# Altium PCB CanSat OBC.PcbDoc
Units mm, origin at the board's own origin, x right, y up, seen from the top; angles counter-clockwise.
Board outline 50 x 50 mm, 4 copper layers (Top Layer, Ground, Power, Bottom Layer), stack 1.641 mm thick; 37 components, 59 nets, 255 pads, 108 vias.
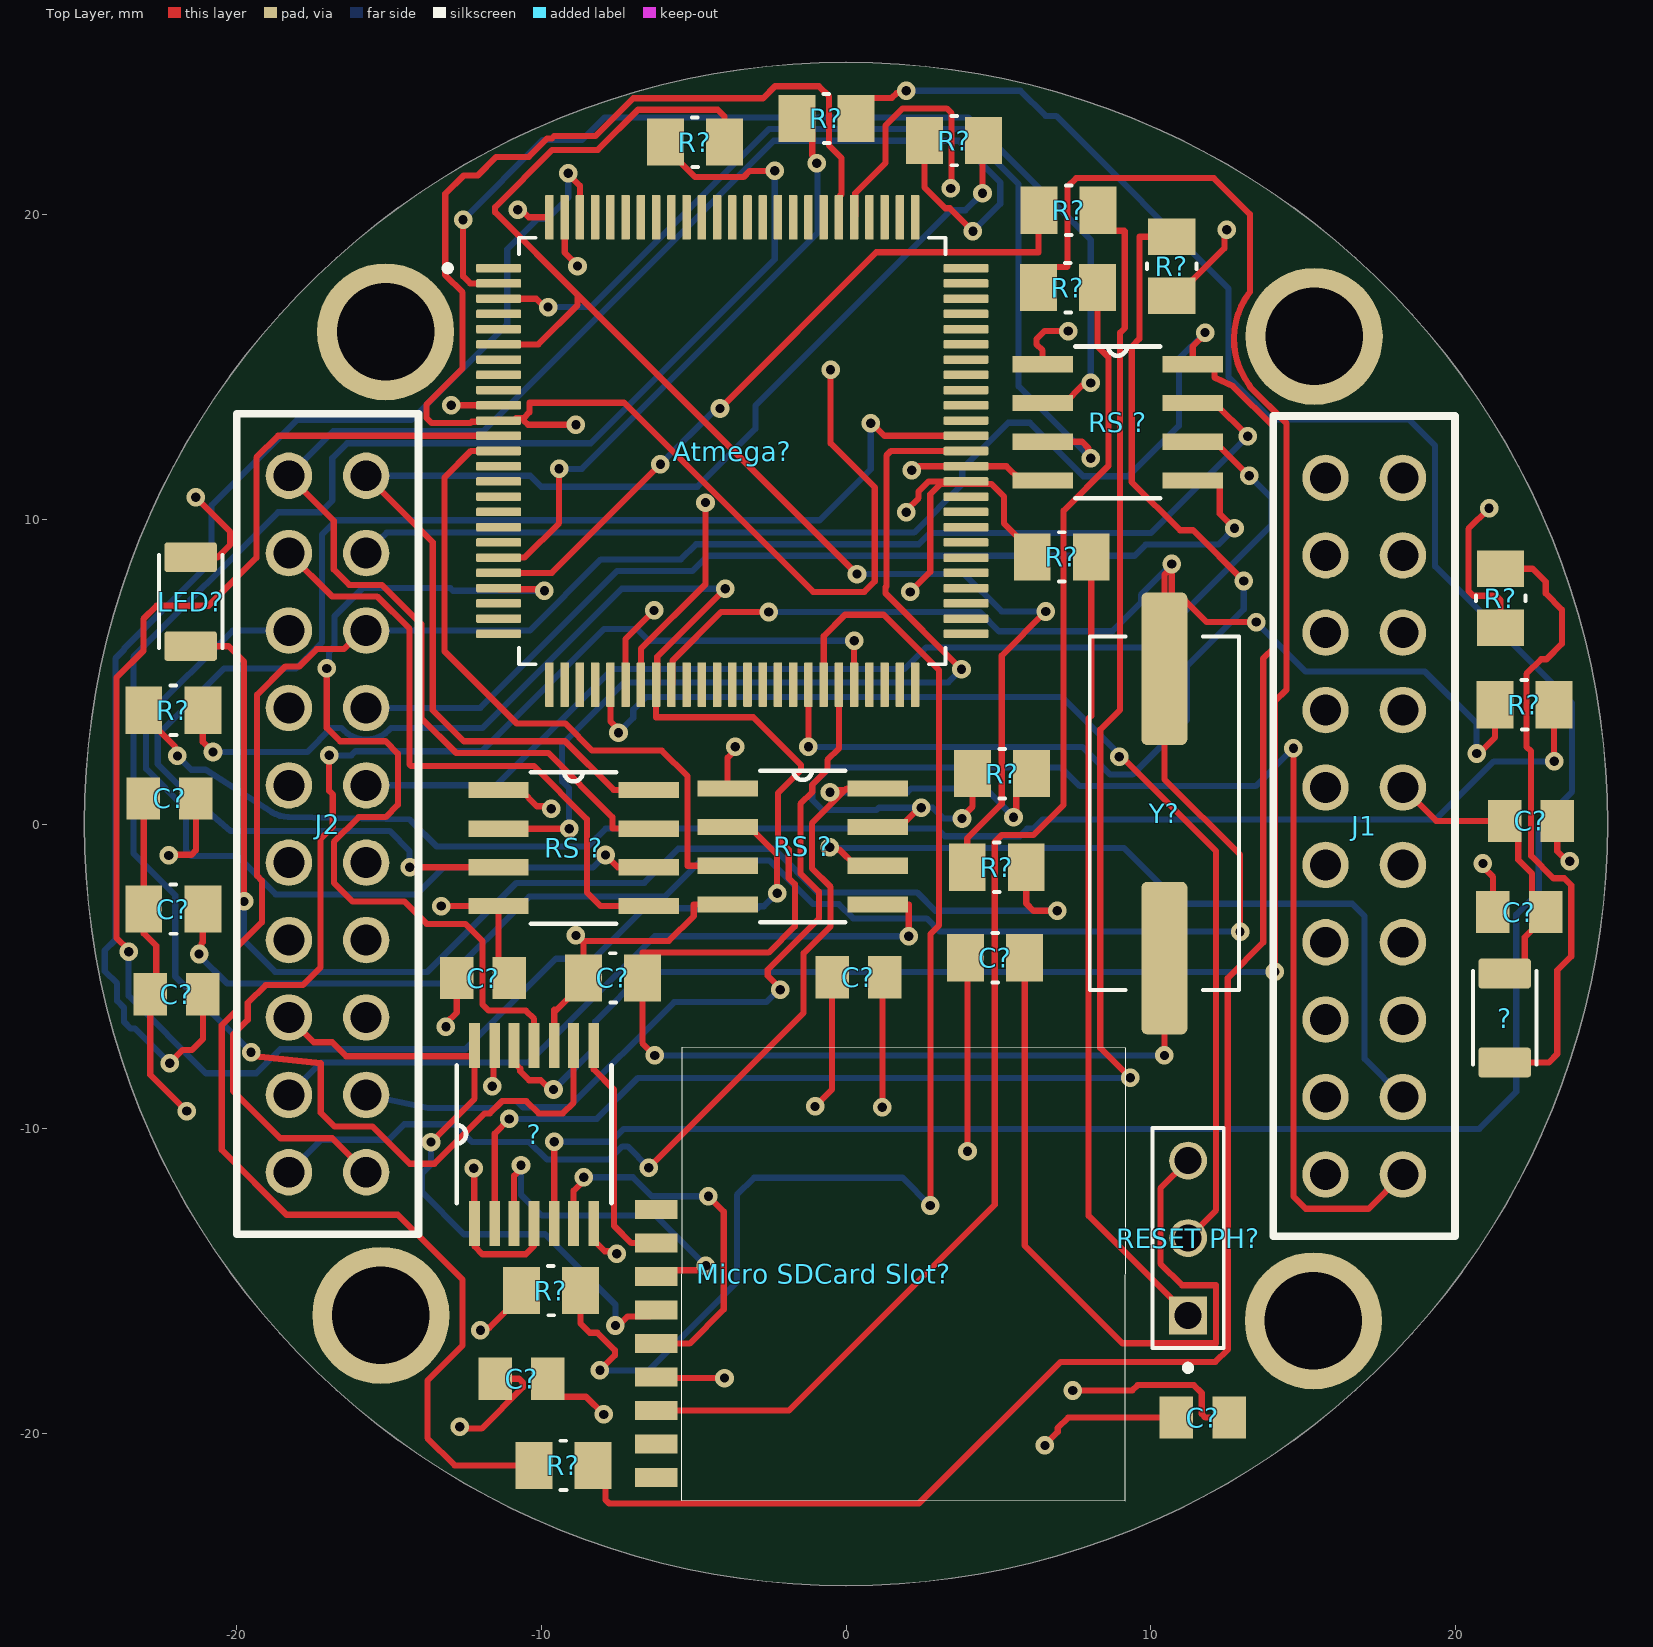
[diagram p0: Top Layer view]
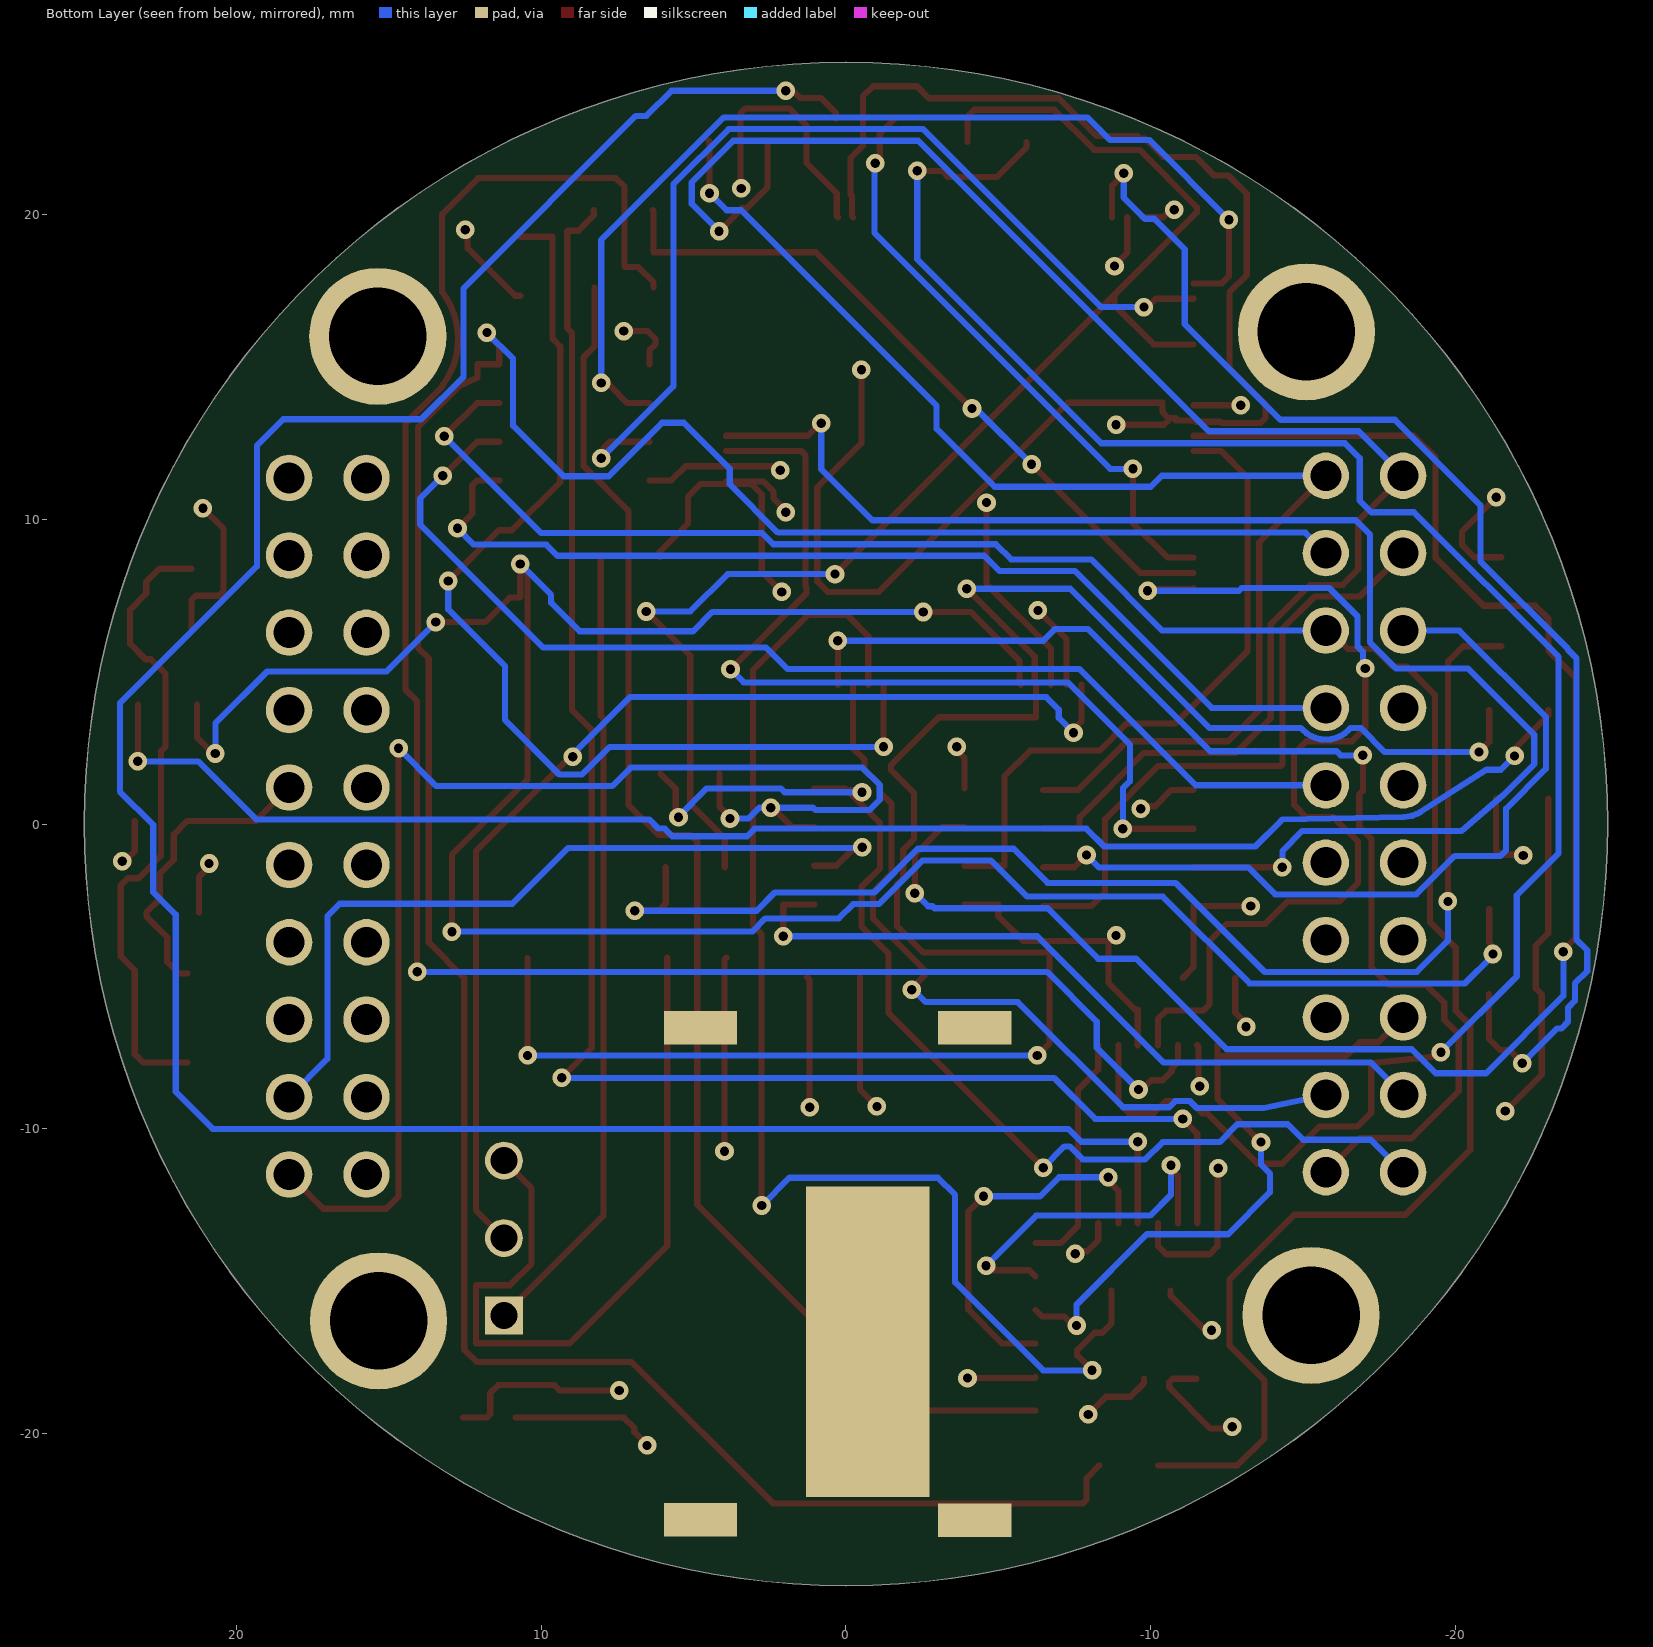
[diagram p1: Bottom Layer view, seen from below]
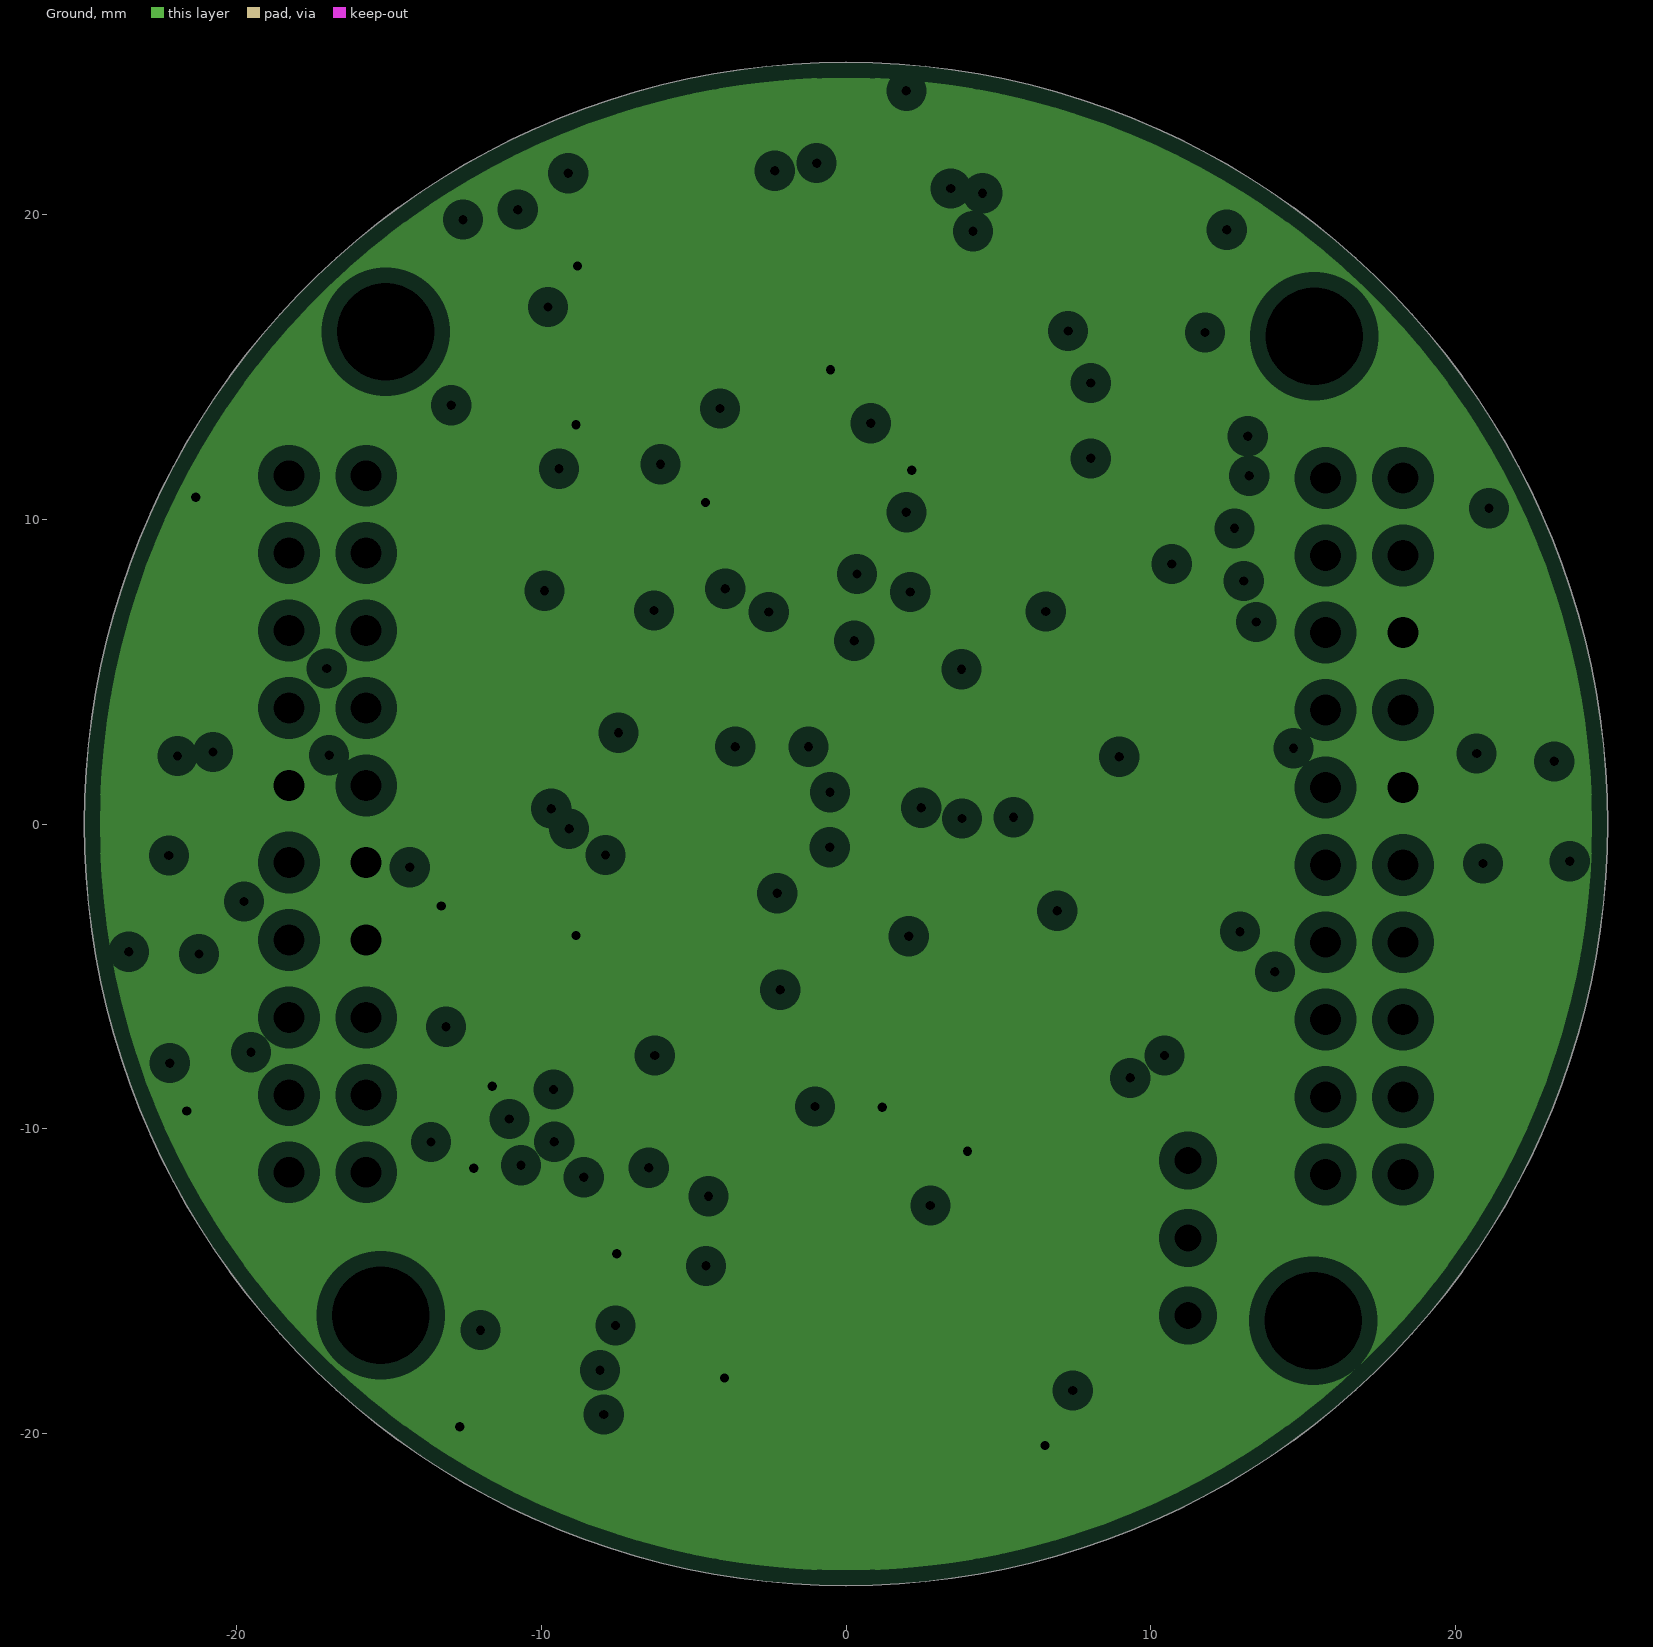
[diagram p2: Ground, clearances drawn from the general rule]
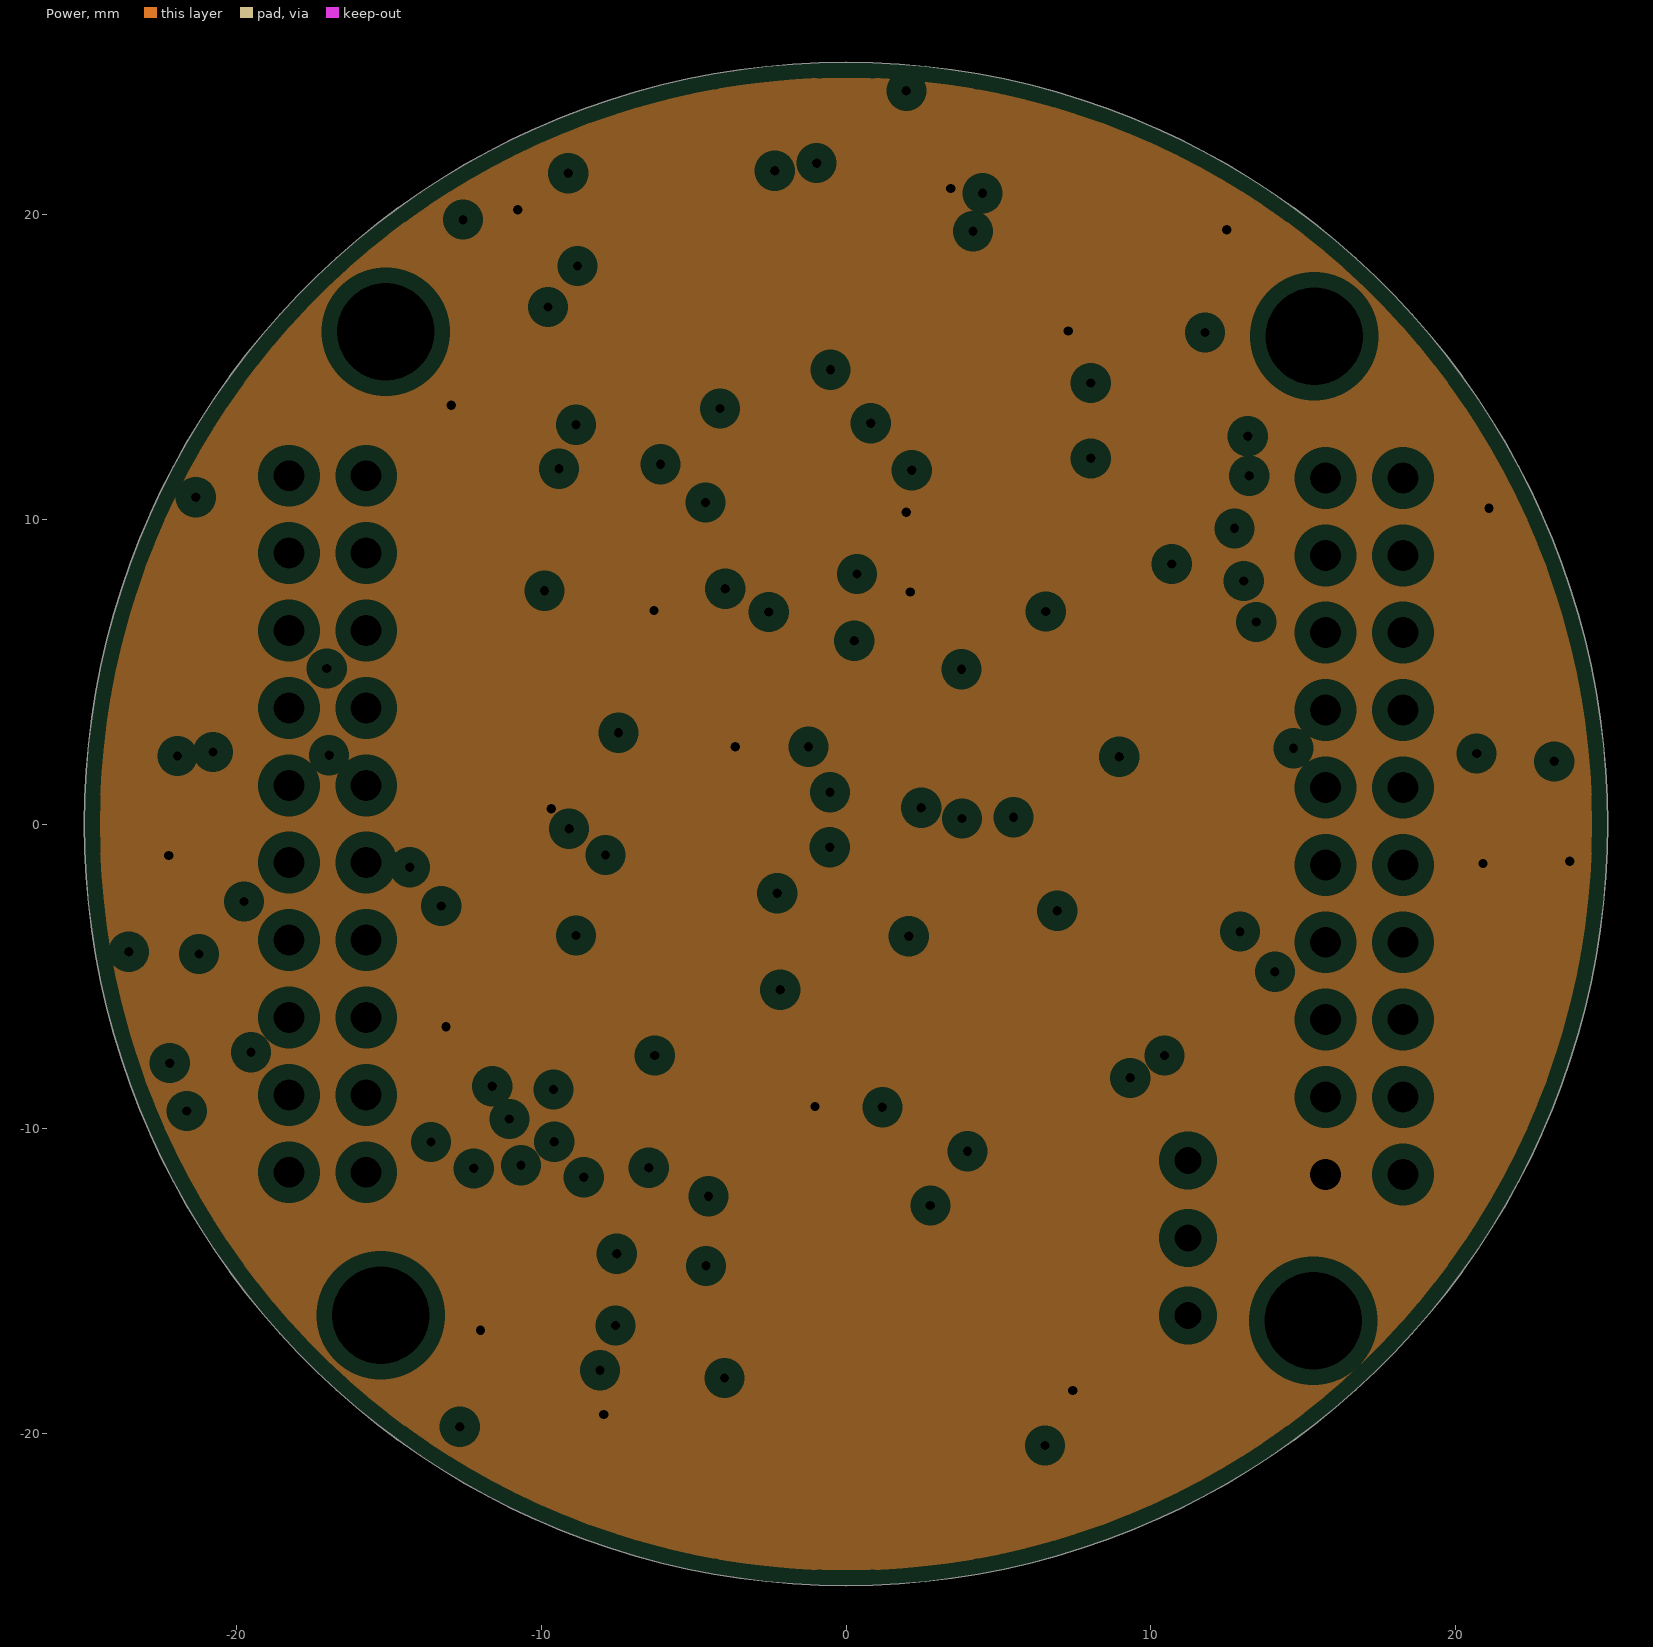
[diagram p3: Power, clearances drawn from the general rule]
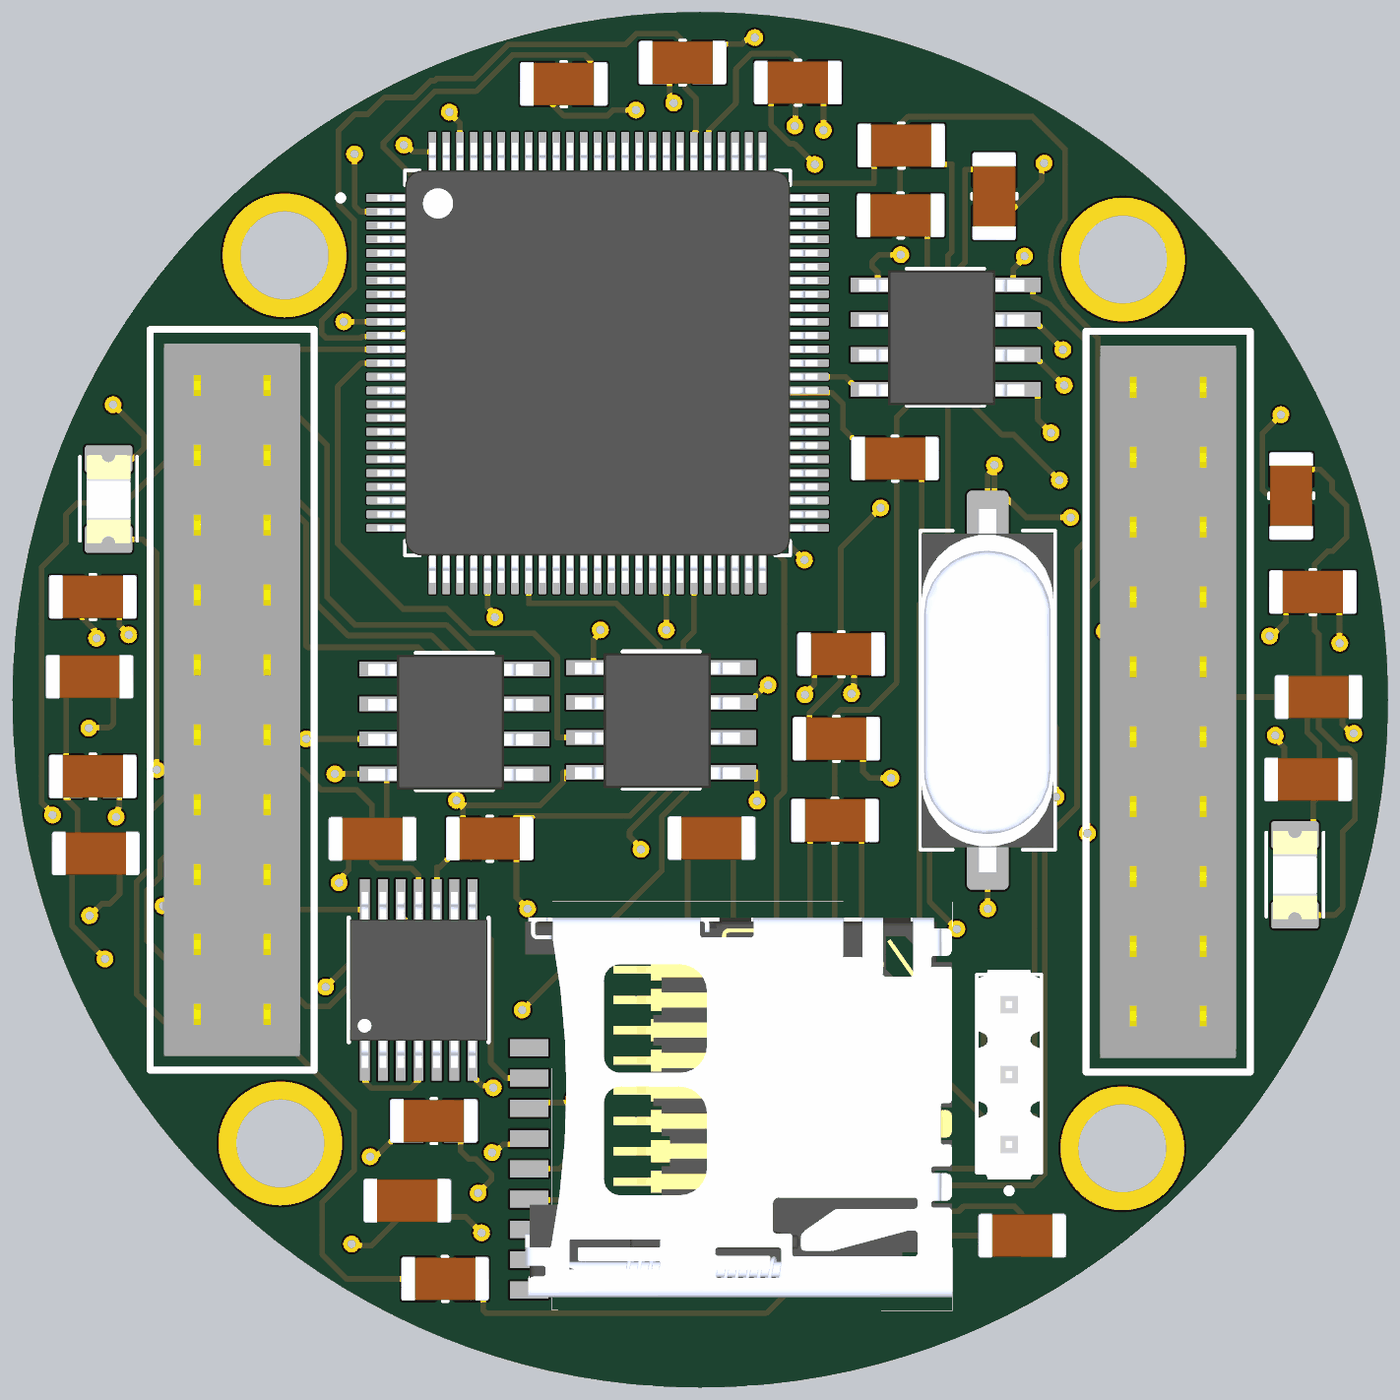
[diagram p4: 3D render of the assembled board from above, using the file's embedded part models]

## Layer stack, top to bottom
Top Solder: solder mask 0.0102, Solder Resist, Dk 3.5
Top Layer: signal copper 0.0356
Dielectric 1: prepreg 0.1702, FR-4, Dk 4.35
Ground: plane copper 0.0178, net G
Dielectric 3: core 1.1938, FR-4, Dk 4.35
Power: plane copper 0.0178, net VCC-5V(OBC)
Dielectric 2: prepreg 0.1702, FR-4, Dk 4.35
Bottom Layer: signal copper 0.0356
Bottom Solder: solder mask 0.0102, Solder Resist, Dk 3.5

## Board outline
-0.001,-25 cw(c-0.001,0) -25.001,0 cw(c-0.001,0) -0.001,25 cw(c-0.001,0) 24.999,0 cw(c-0.001,0)

## Design rules (kind name [scope] priority, off if disabled: settings)
Clearance [All] p1: gap=0.178 ignorepadtopadclearanceinfootprint=FALSE except(0: Arc-Hole Track-Hole SMDPad-Hole THPad-Hole Via-Hole Fill-Hole Poly-Hole Region-Hole Text-Hole)
ComponentClearance [All] p1: gap=0.762 collisioncheckmode=3 verticalgap=0.762 showdistances=FALSE
DiffPairsRouting [All] p1: maxlimit=0.254 minlimit=0.254 mostfreqgap=0.254 toplayer_minwidth=0.381 toplayer_maxwidth=0.381 toplayer_prefwidth=0.381 bottomlayer_minwidth=0.381 bottomlayer_maxwidth=0.381 bottomlayer_prefwidth=0.381 substack1={0761D619-B0FF-4D42-81BD-1B94FE1A46B2} toplayer_{0761d619-b0ff-4d42-81bd-1b94fe1a46b2}_minwidth=0.381 toplayer_{0761d619-b0ff-4d42-81bd-1b94fe1a46b2}_maxwidth=0.381 toplayer_{0761d619-b0ff-4d42-81bd-1b94fe1a46b2}_prefwidth=0.381 bottomlayer_{0761d619-b0ff-4d42-81bd-1b94fe1a46b2}_minwidth=0.381 bottomlayer_{0761d619-b0ff-4d42-81bd-1b94fe1a46b2}_maxwidth=0.381 bottomlayer_{0761d619-b0ff-4d42-81bd-1b94fe1a46b2}_prefwidth=0.381 maxuncoupledlength=12.7
HoleSize [All] p1: absolutevalues=TRUE maxlimit=3.302 minlimit=0.025 maxpercent=80.000 minpercent=20.000
HoleToHoleClearance [All] p1: gap=0.152 allowstackedmicrovias=TRUE
MinimumSolderMaskSliver [All] p1: minsoldermaskwidth=0.076
PlaneClearance [All] p1: clearance=0.508
PlaneConnect [All] p1: planeconnectstyle=Relief reliefexpansion=0.508 reliefentries=4 reliefconductorwidth=0.254 reliefairgap=0.254
PolygonConnect [All] p1: connectstyle=Relief reliefconductorwidth=0.254 reliefentries=4 polygonreliefangle="90 Angle" airgapwidth=0.254
RoutingVias [All] p1: holewidth=0.305 width=0.61 viastyle="Through Hole" minholewidth=0.254 minwidth=0.254 maxholewidth=0.305 maxwidth=0.61
SilkToSilkClearance [All] p1: silktosilkclearance=0.102
SilkToSolderMaskClearance [IsPad] p1: minsilkscreentomaskgap=0.102 clearancetoexposedcopper=TRUE
SolderMaskExpansion [All] p1: expansion=0.076 istentingtop=FALSE
Width [All] p1: maxlimit=1.016 minlimit=0.178 preferedwidth=0.203 substack1={0761D619-B0FF-4D42-81BD-1B94FE1A46B2} toplayer_{0761d619-b0ff-4d42-81bd-1b94fe1a46b2}_prefwidth=0.305 bottomlayer_{0761d619-b0ff-4d42-81bd-1b94fe1a46b2}_prefwidth=0.305 minimp=50.000000 maximp=50.000000 favimp=50.000000
21 further rules are at their usual default settings.

## Classes and differential pairs
component class "CanSat OBC": ? Atmega? C? J1 J2 LED? "Micro SDCard Slot?" "RESET PH?" "RS ?" Y?

## Components (designator, comment, footprint, x,y, rotation, side; value= is the part's Value field where it differs from the comment)
? "BLUE-LED" RESC3015X65-01 21.615,-6.35 r90 top
? "74LVC125APW_118_ic in microSD module" SOP65P640X110-14N -10.236,-10.185 r90 top
Atmega? "" QFP50P1600X1600X120-100N -3.734,12.243 r0 top
C? "(1206) 22pF" CAPC3216X125N0 -22.098,-2.743 r0 top
C? "(0805) 100nF" CAPC2012X95N-0 -21.971,-5.588 r0 top
C? "(0805) 100nF" CAPC2012X95N-0 11.709,-19.482 r0 top
C? "(0805) 100nF" CAPC2012X95N-0 -10.646,-18.207 r0 top
C? "(1206) 22pF" CAPC3216X125N0 4.877,-4.343 r0 top
C? "(0805) 100nf" CAPC2012X95N-0 -11.913,-5.055 r0 top
C? "(0805) 100nf" CAPC2012X95N-0 22.098,-2.896 r0 top
C? "(0805) 100nf" CAPC2012X95N-0 0.406,-5.029 r0 top
C? "(0805) 100nF" CAPC2012X95N-0 -22.2,0.838 r0 top
C? "(1206) 22pF" CAPC3216X125N0 -7.671,-5.004 r0 top
C? "(0805) 100nF" CAPC2012X95N-0 22.479,0.102 r0 top
J1 "20 Position Elevated Socket Connector" ESQ-110-XX-X-D 17.008,-0.071 r90 top
J2 "20 Position Elevated Socket Connector" ESQ-110-XX-X-D -17.018,0 r90 top
LED? "(1206) Yellow" RESC3015X65-01 -21.514,7.315 r90 top
"Micro SDCard Slot?" "Micro-SD-Card-Module" SD-Card-Module -6.225,-12.655 r90 top
R? "(1206) 3.3K" CAPC3216X125N0 -4.978,22.428 r0 top
R? "(1206) 3.3K" CAPC3216X125N0 -0.66,23.206 r0 top
R? "(1206) 150" CAPC3216X125N0 4.928,-1.372 r0 top
R? "(1206) 85" CAPC3216X125N0 21.438,7.391 r90 top
R? "(1206) 10K" CAPC3216X125N0 10.643,18.288 r90 top
R? "(1206) 120" CAPC3216X125N0 5.105,1.702 r0 top
R? "(1206) 510K" CAPC3216X125N0 -22.098,3.785 r0 top
R? "(1206) 10K" CAPC3216X125N0 7.061,8.814 r0 top
R? "(1206) 3.3K" CAPC3216X125N0 7.29,20.193 r0 top
R? "(1206) 120" CAPC3216X125N0 -9.296,-21.006 r0 top
R? "(1206) 3.3K" CAPC3216X125N0 7.264,17.653 r0 top
R? "(1206) 510K" CAPC3216X125N0 22.25,3.962 r0 top
R? "(1206) 10K" CAPC3216X125N0 -9.703,-15.265 r0 top
R? "(1206) 120" CAPC3216X125N0 3.531,22.479 r0 top
"RESET PH?" "3 Position PinHeader 1Row" TE_3-103327-3 11.227,-16.129 r90 top
"RS ?" "" SOIC127P600X175-8N0 8.915,13.183 r0 top
"RS ?" "" SOIC127P600X175-8N0 -1.422,-0.737 r0 top
"RS ?" "" SOIC127P600X175-8N0 -8.941,-0.787 r0 top
Y? "16MHZ" XTAL1140X490X430N-0 10.49,0.356 r90 top

## Footprints (in the part's own frame and the unit in brackets; to place one, negate y for a bottom-side part, rotate by r counter-clockwise, add the part's x,y. Pads: shape width x height; smd on the part's side, far side on the other; paste and mask are expansions set on the pad)
CAPC2012X95N-0 [mm]
  rect 1.1x1.38 smd: 1(-0.863,0) 2(0.863,0)
  body extent -1.6,-0.8 1.6,0.8, height 1.2
CAPC3216X125N0 [mm]
  rect 1.21x1.55 smd: 1(-0.95,-0.048) 2(0.987,-0.048)
  silkscreen extent -0.08,-0.86 0.12,0.76, body extent -1.58,-0.84 1.62,0.76, height 1.25
ESQ-110-XX-X-D [mil]
  round 60 hole 40: 1(-450,50) 2(-450,-50) 3(-350,50) 4(-350,-50) 5(-250,50) 6(-250,-50) 7(-150,50) 8(-150,-50) 9(-50,50) 10(-50,-50) 11(50,50) 12(50,-50) 13(150,50) 14(150,-50) 15(250,50) 16(250,-50) 17(350,50) 18(350,-50) 19(450,50) 20(450,-50)
  silkscreen extent -530,-117 530,117, body extent -510,-100 510,100, height 329
QFP50P1600X1600X120-100N [mm]
  rrect25% 1.47x0.28 smd mask+0.05: 1(-7.67,6) 2(-7.67,5.5) 3(-7.67,5) 4(-7.67,4.5) 5(-7.67,4) 6(-7.67,3.5) 7(-7.67,3) 8(-7.67,2.5) 9(-7.67,2) 10(-7.67,1.5) 11(-7.67,1) 12(-7.67,0.5) 13(-7.67,0) 14(-7.67,-0.5) 15(-7.67,-1) 16(-7.67,-1.5) 17(-7.67,-2) 18(-7.67,-2.5) 19(-7.67,-3) 20(-7.67,-3.5) 21(-7.67,-4) 22(-7.67,-4.5) 23(-7.67,-5) 24(-7.67,-5.5) 25(-7.67,-6) 51(7.67,-6) 52(7.67,-5.5) 53(7.67,-5) 54(7.67,-4.5) 55(7.67,-4) 56(7.67,-3.5) 57(7.67,-3) 58(7.67,-2.5) 59(7.67,-2) 60(7.67,-1.5) 61(7.67,-1) 62(7.67,-0.5) 63(7.67,0) 64(7.67,0.5) 65(7.67,1) 66(7.67,1.5) 67(7.67,2) 68(7.67,2.5) 69(7.67,3) 70(7.67,3.5) 71(7.67,4) 72(7.67,4.5) 73(7.67,5) 74(7.67,5.5) 75(7.67,6)
  rrect25% 0.28x1.47 smd mask+0.05: 26(-6,-7.67) 27(-5.5,-7.67) 28(-5,-7.67) 29(-4.5,-7.67) 30(-4,-7.67) 31(-3.5,-7.67) 32(-3,-7.67) 33(-2.5,-7.67) 34(-2,-7.67) 35(-1.5,-7.67) 36(-1,-7.67) 37(-0.5,-7.67) 38(0,-7.67) 39(0.5,-7.67) 40(1,-7.67) 41(1.5,-7.67) 42(2,-7.67) 43(2.5,-7.67) 44(3,-7.67) 45(3.5,-7.67) 46(4,-7.67) 47(4.5,-7.67) 48(5,-7.67) 49(5.5,-7.67) 50(6,-7.67) 76(6,7.67) 77(5.5,7.67) 78(5,7.67) 79(4.5,7.67) 80(4,7.67) 81(3.5,7.67) 82(3,7.67) 83(2.5,7.67) 84(2,7.67) 85(1.5,7.67) 86(1,7.67) 87(0.5,7.67) 88(0,7.67) 89(-0.5,7.67) 90(-1,7.67) 91(-1.5,7.67) 92(-2,7.67) 93(-2.5,7.67) 94(-3,7.67) 95(-3.5,7.67) 96(-4,7.67) 97(-4.5,7.67) 98(-5,7.67) 99(-5.5,7.67) 100(-6,7.67)
  silkscreen extent -9.44,-7 7,7, body extent -8,-8 8,8, height 1.12
RESC3015X65-01 [mm]
  rrect20% 0.98x1.72 smd: 1(-1.479,-0.004) 2(1.441,-0.004)
  silkscreen extent -1.54,-1.04 1.52,1.04, body extent -1.63,-0.8 1.57,0.8, height 1.1
SD-Card-Module [mm]
  rect 0.62x1.4 smd mask+0.076: 1(0,0) 2(-1.1,0) 3(-2.2,0) 4(-3.3,0) 5(-4.4,0) 6(-5.5,0) 7(-6.6,0) 8(-7.7,0) 9(-8.8,0)
  rect 1.1x2.4 smd far side: GND(-10.19,-2) GND(-10.18,-11) GND(5.97,-2) GND(5.97,-11)
  rect 10.2x4.05 smd far side: GND(-4.34,-5.51)
  silkscreen extent -9.55,-15.4 5.32,-0.84, body extent -9.06,-15.37 4.74,0.13, height 1.95
SOIC127P600X175-8N0 [mil]
  rect 78x21 smd: 1(-97,75) 2(-97,25) 3(-97,-25) 4(-97,-75) 5(97,-75) 6(97,-25) 7(97,25) 8(97,75)
  silkscreen extent -55,-98 55,98, body extent -124,-97 113,95, height 67
SOP65P640X110-14N [mil]
  rect 58x14 smd: 1(-115,77) 2(-115,51) 3(-115,26) 4(-115,0) 5(-115,-26) 6(-115,-51) 7(-115,-77) 8(115,-77) 9(115,-51) 10(115,-26) 11(115,0) 12(115,26) 13(115,51) 14(115,77)
  silkscreen extent -89,-100 89,100, body extent -126,-98 126,98, height 43
TE_3-103327-3 [mm]
  rect 1.24x1.24 hole 0.89: 1(0,0)
  round 1.24 hole 0.89: 2(2.54,0) 3(5.08,0)
  silkscreen extent -1.82,-1.17 6.15,1.17, body extent -1.31,-1.2 6.31,1.21, height 8.18
XTAL1140X490X430N-0 [mm]
  rrect25% 5.01x1.51 smd: 1(-4.757,0.04) 2(4.743,0.04)
  silkscreen extent -5.81,-2.41 5.79,2.49, body extent -6.62,-2.35 6.58,2.45, height 4.3

## Part data
? LED?: library part "LED 1206", "LED SMD 1206 High Quality Forward Voltage: 3.2 V / Brightness: 700 mcd", Emitting Color=Amber, Forward Voltage=2V, Manufacturer="Wurth Elektronik", Manufacturer Part Number=150060AS75003, Operating Temperature max.=100C, Operating Temperature min.=-40C, Chip Technology=AlInGaP, ComponentLink1Description="Manufacturer Link", ComponentLink1URL=http://www.we-online.de, ComponentLink2Description=Datasheet, ComponentLink2URL=https://www.we-online.com/catalog/datasheet/150060AS75003.pdf, Dominant Wavelength=605nm, Height=0.7mm, Length=1.6mm, Luminous Intensity=350mcd, Mounting Technology=SMT, Packaging="Tape and Reel", Peak Wavelength=610nm, Size=0603, Viewing Angle=140°, Width=0.8mm
Atmega?: library part ATMEGA2560-16AU, Package=None, Availability=Unavailable, MP=ATMEGA2560-16AU, Price=None
C? C? C?: library part "Capacitor 1206", "UMF316B7103KFHT/1206 Capacitor", Package=None, Availability=Unavailable, MP=UMF316B7103KFHT, Price=None
C? C? C? C? C? C? C? C?: library part "Capacitor 0805", "UMK212SD103KD-T/CAP CER 10000PF 50V 0805", Package=None, Availability=Unavailable, MP=UMK212SD103KD-T, Price=None
J1 J2: "20 Position Elevated Socket Connector Through Hole", Package=None, Availability=Unavailable, MF=Samtec, MP=ESQ-110-14-T-D, Price=None, SnapEDA_Link=https://www.snapeda.com/parts/ESQ-110-14-T-D/Samtec%20Inc./view-part/786056/?ref=snap
R? R? R? R? R? R? R? R? R? R? R? R? R? R?: library part "Resistor 1206"
"RESET PH?": "Conn Unshrouded Header HDR 3 POS 2.54mm Solder ST Thru-Hole Carton", Package=None, Availability=Unavailable, EU_RoHS_Compliance=Compliant, MF="TE Connectivity", MP=4-103327-5, Price=None, SnapEDA_Link=https://www.snapeda.com/parts/4-103327-5/TE%20Connectivity%20AMP%20Connectors/view-part/2403997/?ref=snap, TE_purchase_URL=https://www.te.com/usa-en/product-4-103327-5.html?te_bu=Cor&te_type=disp&te_campaign=seda_glo_cor-seda-global-disp-prtnr-fy19-seda-model-bom-cta_sma-317_1&elqCampaignId=32493
"RS ?" "RS ?" "RS ?": library part MAX488ESA+, "1/1 Transceiver Full RS422, RS485 8-SOIC", Package="SOIC-8 Maxim", Availability=Unavailable, MF="Maxim Integrated", MP=MAX488ESA+T, Price=None, SnapEDA_Link=https://www.snapeda.com/parts/MAX488ESA+T/Maxim%20Integrated/view-part/48834/?ref=snap
Y?: library part "Crystal 16MHZ"

## Free pads (board coordinates)
  round 4.5 hole 3.2 unplated: 1(15.367,16.002) 2(15.342,-16.307) 3(-15.265,-16.129) 4(-15.113,16.154)

## Via types
v1: diameter 0.61, hole 0.305, Top Layer to Bottom Layer, 108 vias

## Nets (pads, with @x,y where several pads share a name; then routed paths per layer and width w, separated by ;. In a path a pad name is that pad's centre, name@x,y a point inside that pad or via, vN(x,y) a via of type N, cw(c..) or ccw(c..) an arc to the next point about the centre after c; other vN are vias at no path point)
3.3V: J1.20
5V: J1.10
9V: J1.14
AREF: Atmega?.98 C?.2@-21.108,-5.588 | length 43.4
  Top Layer w0.203: v1(-22.2,-7.849) -21.767,-7.416 -21.463,-7.416 -21.108,-7.062 C?.2@-21.108,-5.588 ; v1(-9.119,21.361) -9.119,21.337 -8.734,20.953 Atmega?.98
  Bottom Layer w0.203: v1(-22.2,-7.849) -23.333,-6.715 -23.476,-6.715 -23.698,-6.493 -23.698,-6.028 -23.927,-5.799 -23.927,-5.232 -24.329,-4.831 -24.329,-4.148 -23.978,-3.797 -23.978,5.435 -23.698,5.714 -23.698,5.746 -20.825,8.619 -20.825,10.461 -18.017,13.27 -14.258,13.27 -11.121,16.407 -11.121,18.866 -10.119,19.868 -9.813,19.868 -9.119,20.562 v1(-9.119,21.361)
CS: Atmega?.6 R?.1@3.977,-1.419 R?.2@-3.992,22.381 | length 46.4
  Top Layer w0.203: Atmega?.6 -10.105,15.743 -8.814,17.034 -8.814,17.376 ; R?.2@-3.992,22.381 -3.992,23.222 -4.212,23.442 -6.828,23.442 -8.147,22.123 -9.646,22.123 -11.519,20.25 -11.519,20.082 -8.814,17.376 ; v1(0.36,8.202) -8.814,17.376 ; R?.1@3.977,-1.419 3.977,-0.474 5.11,0.659 5.11,5.527 v1(6.558,6.975)
  Bottom Layer w0.203: v1(0.36,8.202) 3.883,8.202 5.11,6.975 v1(6.558,6.975)
G: "Micro SDCard Slot?.6" "RS ?.4" ?.1@-12.192,-13.106 ?.2@21.619,-4.909 ?.4 ?.7 ?.10 ?.13 Atmega?.11 Atmega?.32 Atmega?.62 Atmega?.81 Atmega?.99 C?.1@3.927,-4.391 C?.1@10.846,-19.482 C?.1@21.616,0.102 C?.1@-8.621,-5.051 C?.1@-11.509,-18.207 C?.1@-22.834,-5.588 C?.1@-23.048,-2.791 C?.1@-23.063,0.838 C?.2@1.269,-5.029 C?.2@22.961,-2.896 C?.2@-11.05,-5.055 J1.12 J1.16 J2.8 J2.10 J2.11 LED?.2 | length 135.4
  Top Layer w0.203: C?.1@-23.063,0.838 -23.048,0.824 -23.048,-2.791 -23.048,-3.591 -22.642,-3.998 -22.642,-5.396 -22.834,-5.588 -22.834,-8.23 v1(-21.641,-9.423) ; LED?.2 -20.625,8.757 -20.218,9.163 -20.218,9.599 v1(-21.346,10.726) ; v1(-13.284,-2.694) -13.283,-2.693 -11.406,-2.693 ; v1(-12.675,-19.787) -12.616,-19.845 -11.963,-19.845 -10.613,-18.495 -10.613,-18.326 -10.732,-18.207 C?.1@-11.509,-18.207 ; v1(-12.217,-11.303) -12.205,-11.316 -12.205,-13.094 -12.192,-13.106 -12.192,-13.866 -11.933,-14.124 -10.511,-14.124 -10.236,-13.85 ?.4 ; v1(-11.608,-8.604) -11.57,-8.566 -11.57,-7.303 ?.13 ; Atmega?.11 Atmega?.11@-10.821,13.243 ; Atmega?.11@-11.404,13.281 -11.481,13.204 -12.283,13.204 -12.329,13.159 -13.602,13.159 -13.767,13.323 -13.767,13.771 -12.584,14.954 -12.584,17.448 -13.153,18.017 -13.153,20.687 -12.554,21.285 -12.09,21.285 -11.481,21.895 -10.413,21.895 -9.803,22.504 -9.652,22.504 -9.576,22.581 -8.229,22.581 -6.986,23.823 -2.721,23.823 -2.331,24.212 -0.89,24.212 -0.558,23.881 -0.558,22.267 -0.153,21.862 -0.153,20.665 -0.195,20.623 -0.195,19.951 Atmega?.81 ; C?.2@-11.05,-5.055 -11.405,-4.7 -11.405,-2.692 ; Atmega?.11@-10.821,13.281 -10.821,13.323 -10.574,13.323 -10.389,13.508 -10.389,13.827 -7.283,13.827 -1.074,7.618 0.602,7.618 0.944,7.96 0.944,11.048 -0.508,12.5 v1(-0.508,14.91) ; -10.574,13.243 -10.437,13.106 v1(-8.865,13.106) ; ?.10 -9.576,-6.096 -9.496,-6.096 -8.621,-5.221 -8.621,-3.901 v1(-8.865,-3.658) ; Atmega?.99 -9.234,18.756 -8.814,18.336 v1(-8.814,18.313) ; v1@-8.685,-3.837 -5.812,-3.837 -4.999,-3.024 -4.999,-2.642 -3.886,-2.642 ; ?.7 -8.28,-13.665 -7.921,-14.025 -7.602,-14.025 v1(-7.524,-14.102) ; Atmega?.32 -6.734,5.75 -4.612,7.871 v1(-4.612,10.551) ; -6.225,-18.155 -6.193,-18.186 v1(-3.988,-18.186) ; v1(1.194,-9.296) 1.194,-5.105 C?.2@1.269,-5.029 ; v1(2.159,11.608) 2.269,11.608 2.404,11.743 Atmega?.62 5.262,11.743 5.728,11.278 6.452,11.278 ; C?.1@3.927,-4.391 3.988,-4.452 v1(3.988,-10.744) ; v1(6.528,-20.396) 6.528,-20.374 6.948,-19.954 6.948,-19.824 7.29,-19.482 C?.1@10.846,-19.482 ; J1.12 19.376,0.102 21.616,0.102 22.064,-0.347 22.064,-1.173 22.513,-1.621 22.513,-2.447 22.961,-2.896 22.961,-3.036 22.279,-3.717 22.279,-4.52 21.891,-4.909 ?.2@21.619,-4.909 ; -11.406,-2.693 -11.405,-2.692
MISO: ?.11 Atmega?.22 | length 31.5
  Top Layer w0.203: v1(-17.043,5.105) -17.043,3.152 -16.607,2.716 -15.113,2.716 -14.707,2.31 -14.707,0.633 -15.113,0.227 -15.997,0.227 -16.81,-0.586 -16.81,-1.932 -16.201,-2.542 -14.499,-2.542 -13.762,-3.278 -12.492,-3.278 -11.933,-3.837 -11.933,-5.92 -11.73,-6.123 -10.511,-6.123 -10.236,-6.398 ?.11 ; Atmega?.22 -11.365,7.704 -9.946,7.704 v1(-9.9,7.659)
  Bottom Layer w0.203: v1(-17.043,5.105) -16.966,5.183 -16.966,5.654 -16.789,5.83 -16.789,6.826 -15.87,7.745 -12.983,7.745 -12.897,7.659 v1(-9.9,7.659)
MOSI: Atmega?.21 R?.1@6.34,20.145 | length 23.5
  Top Layer w0.203: Atmega?.21 -9.658,8.243 v1(-6.091,11.809) ; v1(-4.136,13.638) 0.995,18.769 6.314,18.769 6.314,20.12 R?.1@6.34,20.145
  Bottom Layer w0.203: v1(-6.091,11.809) -4.263,13.638 v1(-4.136,13.638)
Net?_1: ?.1@21.619,-7.829 R?.2@21.485,8.378 | length 20.8
  Top Layer w0.203: R?.2@21.485,8.378 22.537,8.378 22.966,7.948 22.966,7.567 23.5,7.034 23.5,5.916 22.992,5.408 22.814,5.408 22.331,4.926 22.331,2.538 22.484,2.386 22.484,-1.043 23.22,-1.78 23.576,-1.78 23.804,-2.008 23.804,-4.345 23.347,-4.802 23.347,-7.549 23.068,-7.829 ?.1@21.619,-7.829
Net?_2: ?.2@-11.532,-13.106 R?.2@8.276,20.145 | length 54.3
  Top Layer w0.203: ?.2@-11.532,-13.106 -11.532,-10.162 v1(-11.049,-9.679) ; R?.2@8.276,20.145 8.276,19.975 8.78,19.472 9.131,19.472 9.149,19.455 9.149,16.28 8.996,16.127 8.996,3.749 8.344,3.097 8.344,-7.351 v1(9.326,-8.333)
  Bottom Layer w0.203: v1(-11.049,-9.679) -8.174,-9.679 -6.828,-8.333 v1(9.326,-8.333)
Net?_3: "Micro SDCard Slot?.3" ?.3 | length 11.8
  Top Layer w0.203: ?.3 -10.897,-11.54 -10.668,-11.311 v1(-10.668,-11.201) ; -6.225,-14.855 -6.016,-14.646 -4.85,-14.646 -4.707,-14.503 v1(-4.597,-14.503)
  Bottom Layer w0.203: v1(-10.668,-11.201) -10.668,-12.169 -9.982,-12.854 -6.247,-12.854 v1(-4.597,-14.503)
Net?_5: ?.5 R?.2@0.326,23.158 | length 84.8
  Top Layer w0.203: ?.5 v1(-9.576,-10.427) ; R?.2@0.326,23.158 0.326,23.328 0.83,23.831 1.505,23.831 1.666,23.992 1.903,23.992 v1(1.981,24.07)
  Bottom Layer w0.203: v1(-9.576,-10.427) -7.72,-10.427 -7.302,-10.009 20.782,-10.009 22.001,-8.79 22.001,-2.974 22.738,-2.237 22.738,-0.027 23.83,1.065 23.83,3.961 19.334,8.456 19.334,12.419 18.47,13.282 13.949,13.282 12.552,14.679 12.552,17.581 6.893,23.241 6.553,23.241 5.724,24.07 v1(1.981,24.07)
Net?_6: "Micro SDCard Slot?.5" ?.6 | length 12.6
  Top Layer w0.203: ?.6 -8.941,-12.036 -8.611,-11.705 v1(-8.611,-11.595) ; -6.225,-17.055 -5.135,-17.055 -4.013,-15.932 -4.013,-12.723 v1(-4.517,-12.219)
  Bottom Layer w0.203: v1(-8.611,-11.595) -6.996,-11.595 -6.372,-12.219 v1(-4.517,-12.219)
Net?_8: "Micro SDCard Slot?.2" ?.8 | length 7.8
  Top Layer w0.203: ?.8 -8.28,-8.054 -7.615,-8.719 -7.615,-13.184 -7.045,-13.755 -6.225,-13.755
Net?_9: ?.9 R?.1@-5.929,22.381 | length 65
  Top Layer w0.203: v1(-19.528,-7.495) -19.401,-7.622 -17.242,-7.85 -17.242,-9.476 -16.785,-9.933 -15.54,-9.933 -14.321,-11.152 -13.508,-11.152 -11.855,-9.5 -11.696,-9.5 -11.291,-9.095 -10.496,-9.095 -10.092,-9.5 -9.296,-9.5 -8.941,-9.144 ?.9 ; R?.1@-5.929,22.381 -5.929,22.211 -4.95,21.233 -3.365,21.233 -3.16,21.438 v1(-2.337,21.438)
  Bottom Layer w0.203: v1(-19.528,-7.495) -22.017,-5.006 -22.017,-2.339 -23.389,-0.967 -23.389,5.485 -18.639,10.234 -17.242,10.234 -16.861,10.615 -16.861,12.012 -16.378,12.495 -8.377,12.495 -2.337,18.536 v1(-2.337,21.438)
Net?_12: ?.12 R?.1@6.314,17.605 | length 64.4
  Top Layer w0.203: ?.12 -10.897,-7.823 -10.693,-8.026 -10.693,-8.117 -10.402,-8.408 -10.018,-8.408 -9.711,-8.714 v1(-9.601,-8.714) ; R?.1@6.314,17.605 6.314,17.775 6.818,18.279 7.247,18.279 7.269,18.301 7.269,20.913 7.556,21.2 12.074,21.2 13.259,20.015 13.259,17.466 ccw(c15.262,15.922) 13.225,14.423 cw(c13.061,14.303) 13.259,14.348 14.457,13.149 14.457,4.409 14.076,4.028 v1(14.076,-4.853)
  Bottom Layer w0.203: v1(-9.601,-8.714) -8.231,-7.344 -8.231,-6.485 -6.599,-4.853 v1(14.076,-4.853)
NetC?_2: "RESET PH?.3" C?.2@5.863,-4.391 | length 24.8
  Top Layer w0.203: C?.2@5.863,-4.391 5.863,-13.836 9.072,-17.045 12.146,-17.045 12.146,-15.14 11.028,-15.14 10.317,-14.429 10.317,-11.959 11.227,-11.049
NetLED?_1: LED?.1 R?.2@5.914,-1.419 | length 43.1
  Top Layer w0.203: LED?.1 -20.265,5.837 -19.757,5.329 v1(-19.757,-2.542) ; R?.2@5.914,-1.419 5.914,-2.609 6.15,-2.845 v1(6.934,-2.845)
  Bottom Layer w0.203: v1(-19.757,-2.542) -19.757,-3.837 -18.741,-4.853 -13.737,-4.853 -10.816,-1.932 -6.622,-1.932 -5.504,-0.815 -2.358,-0.815 -0.924,-2.248 2.332,-2.248 2.929,-2.845 v1(6.934,-2.845)
"NetMicro SDCard Slot?_7": "Micro SDCard Slot?.7" R?.2@8.251,17.605 | length 46.3
  Top Layer w0.203: -6.225,-19.255 -1.875,-19.255 4.881,-12.498 4.881,-0.586 5.103,-0.365 6.151,-0.365 7.142,0.626 7.142,10.285 8.615,11.758 8.615,15.314 8.251,15.679 R?.2@8.251,17.605
NetR?_1: R?.1@-23.048,3.737 R?.2@23.237,3.915 | length 51.4
  Top Layer w0.203: R?.1@-23.048,3.737 -23.048,3.567 -22.023,2.542 -22.023,2.313 v1(-21.946,2.235) ; R?.2@23.237,3.915 23.237,2.064 v1(23.246,2.056)
  Bottom Layer w0.203: v1(-21.946,2.235) -21.488,1.778 -21.019,1.778 -18.848,0.392 ccw(c-18.288,1.27) -18.308,0.229 -14.326,0.152 -14.266,0.093 -13.435,-0.738 -8.479,-0.738 -7.893,-0.152 2.992,-0.152 3.242,-0.403 5.701,-0.403 5.951,-0.152 6.153,-0.152 6.456,0.151 19.359,0.151 21.264,2.056 v1(23.246,2.056)
NetR?_2: "RESET PH?.1" R?.2@8.048,8.766 | length 26.3
  Top Layer w0.203: R?.2@8.048,8.766 8.048,3.55 7.963,3.465 7.963,-12.865 11.227,-16.129
PE3: Atmega?.5
PE5: Atmega?.7
PF0: Atmega?.97
PF1: Atmega?.96
PF2: Atmega?.95
PG5: Atmega?.1
"RD + (OBC-ADCS)": "RS ?.8"@-6.477,1.118 J2.20 R?.2@4.517,22.431 | length 43.3
  Top Layer w0.203: J2.20 -13.564,9.246 -13.564,3.737 -12.543,2.716 -9.224,2.716 -7.626,1.118 -6.477,1.118 ; v1(4.48,20.701) 4.48,22.394 R?.2@4.517,22.431
  Bottom Layer w0.203: J2.20 -10.363,11.43 -10.005,11.073 -4.876,11.073 -2.973,12.975 -2.973,13.733 3.435,20.142 3.921,20.142 v1(4.48,20.701)
"RD + (OBC-COMM)": "RS ?.8"@11.379,15.088 J2.18 R?.2@-8.31,-21.053 | length 93.3
  Top Layer w0.203: R?.2@-8.31,-21.053 -7.895,-21.468 -7.895,-22.184 -7.776,-22.303 2.392,-22.303 7.04,-17.655 12.12,-17.655 12.527,-17.248 12.527,-5.056 13.695,-3.888 13.695,5.434 14.051,5.789 14.051,13.017 12.693,14.375 12.095,14.654 12.095,15.088 11.379,15.088 11.379,15.673 11.786,16.08 v1(11.786,16.129)
  Bottom Layer w0.203: J2.18 -15.072,9.566 2.232,9.566 3.815,11.149 3.815,11.657 5.327,13.17 6.036,13.17 7.789,11.416 9.269,11.416 10.927,13.074 10.927,15.27 v1(11.786,16.129)
"RD + (OBC-EPS)": "RS ?.8"@1.041,1.168 J2.1 R?.2@6.092,1.654 | length 38.8
  Top Layer w0.203: v1(-6.472,-11.279) -1.392,-6.199 -1.392,-4.244 -0.508,-3.359 -0.508,-2.068 -1.118,-1.458 -1.118,0.021 -0.021,1.117 ; v1(-0.525,1.04) -0.447,1.117 -0.021,1.117 ; 1.041,1.168 0.03,1.168 -0.021,1.117 ; v1(5.497,0.219) 5.497,0.329 5.589,0.421 5.589,1.151 R?.2@6.092,1.654
  Bottom Layer w0.203: J2.1 -17.223,-10.365 -15.009,-10.365 -14.499,-9.855 -12.85,-9.855 -12.265,-10.439 -10.39,-10.439 -9.818,-11.011 -7.765,-11.011 -7.337,-10.583 -7.169,-10.583 v1(-6.472,-11.279) ; v1(-0.525,1.04) 2.013,1.04 2.14,1.167 4.568,1.167 5.497,0.237 v1(5.497,0.219)
"RD - (OBC-ADCS)": "RS ?.7"@-6.477,-0.152 J2.19 R?.1@2.58,22.431 | length 53.7
  Top Layer w0.203: J2.19 -16.812,9.954 -16.812,8.355 -16.306,7.849 -15.232,7.849 -13.945,6.561 -13.945,3.478 -12.802,2.335 -9.775,2.335 -7.666,0.226 -7.666,-0.152 -6.477,-0.152 ; R?.1@2.58,22.431 2.58,20.889 3.258,20.212 3.41,20.212 v1(4.166,19.456)
  Bottom Layer w0.203: J2.19 -16.829,12.889 -11.913,12.889 -2.374,22.428 3.697,22.428 5.064,21.061 5.064,20.355 v1(4.166,19.456)
"RD - (OBC-COMM)": "RS ?.7"@11.379,13.818 J2.16 R?.1@-10.247,-21.053 | length 73.1
  Top Layer w0.203: J2.16 -15.869,6.35 -16.479,5.74 -17.374,5.74 -17.945,5.169 -18.401,5.169 -19.329,4.241 -19.329,-1.701 -19.172,-1.858 -19.172,-3.222 -20.015,-4.064 -20.015,-6.13 -20.493,-6.608 -20.493,-10.698 -18.365,-12.826 -14.712,-12.826 -12.584,-14.954 -12.584,-17.116 -13.741,-18.274 -13.741,-20.156 -12.844,-21.053 R?.1@-10.247,-21.053 ; 11.379,13.818 12.103,13.818 13.183,12.738 v1(13.183,12.725)
  Bottom Layer w0.203: J2.16 -10.382,6.35 -8.046,8.686 -5.419,8.686 -4.92,9.185 2.39,9.185 2.755,9.55 10.008,9.55 v1(13.183,12.725)
"RD - (OBC-EPS)": "RS ?.7"@1.041,-0.102 J1.2 R?.1@4.155,1.654 | length 45.1
  Top Layer w0.203: 1.041,-0.102 1.765,-0.102 2.4,0.533 v1(2.468,0.533) ; v1(3.807,0.181) 3.807,0.226 4.155,0.574 R?.1@4.155,1.654 ; v1(14.686,2.487) 14.686,-12.219 15.092,-12.626 17.153,-12.626 J1.2
  Bottom Layer w0.203: v1(2.468,0.533) 2.845,0.533 ; v1(3.807,0.181) 3.197,0.181 2.845,0.533 ; v1(14.686,2.487) 13.441,1.243 7.675,1.243 7.066,1.852 -0.538,1.852 -1.109,1.281 -1.109,0.798 -0.767,0.455 1,0.455 1.078,0.533 2.845,0.533
RESET: "RESET PH?.2" Atmega?.30 | length 37.2
  Top Layer w0.203: Atmega?.30 -7.734,3.371 -7.468,3.105 v1(-7.468,2.995) ; v1(8.966,2.208) 9.047,2.208 12.146,-0.891 12.146,-12.67 11.227,-13.589
  Bottom Layer w0.203: v1(-7.468,2.995) -6.982,3.481 -6.982,3.756 -6.574,4.164 7.091,4.164 8.966,2.289 v1(8.966,2.208)
RXD0: "RS ?.2"@6.452,13.818 Atmega?.2 | length 33.3
  Top Layer w0.203: v1(-12.568,19.837) -12.568,17.971 -12.34,17.743 Atmega?.2 ; 6.452,13.818 7.175,13.818 7.758,14.4 7.953,14.4 v1(8.031,14.478)
  Bottom Layer w0.203: v1(-12.568,19.837) -9.952,22.454 -8.661,22.454 -7.925,23.19 4.013,23.19 8.031,19.171 v1(8.031,14.478)
RXD1: Atmega?.45 J2.4 | length 27.1
  Top Layer w0.203: v1(-2.159,-5.437) -2.159,-5.391 -2.567,-4.983 -2.567,-4.783 -0.889,-3.105 -0.889,-2.226 -1.499,-1.616 -1.499,0.66 -1.109,1.05 -1.109,1.281 -0.61,1.781 -0.61,2.102 -0.234,2.477 Atmega?.45
  Bottom Layer w0.203: J2.4 -13.723,-9.317 -13.681,-9.322 -11.518,-9.322 -11.291,-9.095 -10.807,-9.095 -10.604,-9.298 -9.095,-9.298 -5.641,-5.844 -2.615,-5.844 -2.208,-5.437 v1(-2.159,-5.437)
RXD2: "RS ?.2"@-3.886,-0.102 Atmega?.12 | length 57
  Top Layer w0.203: v1(-23.546,-4.191) -23.546,-4.132 -23.948,-3.731 -23.948,4.799 -23.059,5.688 -23.059,6.729 -22.627,7.161 -20.925,7.161 -19.35,8.736 -19.35,12.032 -18.639,12.743 Atmega?.12 ; -3.886,-0.102 -3.162,-0.102 -2.261,-1.003 v1(-2.261,-2.277)
  Bottom Layer w0.203: v1(-23.546,-4.191) -23.546,-5.641 -21.008,-8.179 -19.355,-8.179 -18.569,-7.393 -12.492,-7.393 -9.52,-4.421 -8.276,-4.421 -6.619,-2.765 -2.904,-2.765 -2.841,-2.702 -2.697,-2.702 -2.272,-2.277 v1(-2.261,-2.277)
RXD3: "RS ?.2"@-11.405,-0.152 Atmega?.63 | length 30
  Top Layer w0.203: -11.405,-0.152 -11.404,-0.153 v1(-9.089,-0.154) v1(-9.089,-0.154) ; v1(3.789,5.078) 1.295,7.572 1.295,7.773 1.325,7.803 1.325,12.095 1.473,12.243 Atmega?.63
  Bottom Layer w0.203: v1(-9.089,-0.154) -9.089,1.171 -9.317,1.399 -9.317,2.614 -7.285,4.646 3.357,4.646 v1(3.789,5.078)
SCK: Atmega?.20 R?.1@-1.611,23.158 | length 20
  Top Layer w0.203: Atmega?.20 -10.555,8.743 -9.419,9.879 v1(-9.419,11.657) ; R?.1@-1.611,23.158 -1.107,22.655 -1.107,21.944 -0.965,21.802 v1(-0.965,21.692)
  Bottom Layer w0.203: v1(-9.419,11.657) -8.677,11.657 -0.94,19.394 -0.94,21.666 v1(-0.965,21.692)
SCL: Atmega?.43 R?.2@10.69,19.275 | length 35.2
  Top Layer w0.203: v1(-1.234,2.532) Atmega?.43 ; R?.2@10.69,19.275 9.631,19.275 9.631,15.924 9.377,15.67 9.377,11.225 10.963,9.639 11.392,9.639 v1(13.056,7.976)
  Bottom Layer w0.203: v1(-1.234,2.532) 7.758,2.532 8.666,1.624 9.403,1.624 11.19,3.411 11.19,5.177 13.056,7.043 v1(13.056,7.976)
SDA: Atmega?.44 R?.2@-8.716,-15.313 | length 43.1
  Top Layer w0.203: R?.2@-8.716,-15.313 -8.716,-16.393 -8.413,-16.696 -8.161,-16.696 -7.585,-17.272 -7.585,-17.441 v1(-8.077,-17.932) ; Atmega?.44 -0.734,6.17 -0.033,6.871 1.235,6.871 3.053,5.053 3.053,-3.329 2.769,-3.613 v1(2.769,-12.522)
  Bottom Layer w0.203: v1(-8.077,-17.932) -6.471,-17.932 -3.581,-15.043 -3.581,-12.173 -3.018,-11.61 1.856,-11.61 v1(2.769,-12.522)
"TD + (OBC-ADCS)": "RS ?.5"@-6.477,-2.692 J2.17 | length 20.6
  Top Layer w0.203: J2.17 -16.866,7.468 -15.39,7.468 -14.326,6.404 -14.326,1.954 -14.279,1.908 -10.249,1.908 -8.504,0.163 -8.504,-2.237 -8.049,-2.692 -6.477,-2.692
"TD + (OBC-COMM)": "RS ?.5"@11.379,11.278 J2.14 | length 33.5
  Top Layer w0.203: 11.379,11.278 12.103,11.278 12.268,11.112 12.268,10.185 v1(12.751,9.703)
  Bottom Layer w0.203: J2.14 -12.008,3.81 -7.513,8.305 -5.038,8.305 -4.539,8.804 9.47,8.804 9.835,9.169 12.217,9.169 v1(12.751,9.703)
"TD + (OBC-EPS)": "RS ?.5"@1.041,-2.642 J2.3 | length 24.6
  Top Layer w0.203: 1.041,-2.642 2.062,-2.642 v1(2.062,-3.685)
  Bottom Layer w0.203: J2.3 -17.223,-7.825 -10.42,-7.825 -6.28,-3.685 v1(2.062,-3.685)
"TD - (OBC-ADCS)": "RS ?.6"@-6.477,-1.422 J2.15 | length 27.3
  Top Layer w0.203: v1(-7.895,-1.018) -7.49,-1.422 -6.477,-1.422
  Bottom Layer w0.203: J2.15 -20.136,6.35 -22.972,3.514 -22.972,1.81 -21.666,0.504 -21.666,-0.864 -21.484,-1.046 -19.985,-1.046 -18.718,-2.313 -14.092,-2.313 -13.203,-1.424 -8.301,-1.424 v1(-7.895,-1.018)
"TD - (OBC-COMM)": "RS ?.6"@11.379,12.548 J2.12 | length 37.5
  Top Layer w0.203: 11.379,12.548 12.103,12.548 13.221,11.43 v1(13.233,11.43)
  Bottom Layer w0.203: J2.12 -11.483,1.27 -7.666,5.087 1.918,5.087 2.621,5.789 9.938,5.789 13.975,9.826 13.975,10.689 v1(13.233,11.43)
"TD - (OBC-EPS)": "RS ?.6"@1.041,-1.372 J1.4 | length 26.8
  Top Layer w0.203: v1(-0.533,-0.762) -0.456,-0.84 -0.214,-0.84 0.317,-1.372 1.041,-1.372
  Bottom Layer w0.203: v1(-0.533,-0.762) -0.511,-0.784 9.118,-0.784 10.952,-2.618 16.616,-2.618 17.023,-3.024 17.023,-7.706 J1.4
TXD0: "RS ?.3"@6.452,12.548 Atmega?.3 | length 32.3
  Top Layer w0.203: Atmega?.3 -10.165,17.243 -9.889,16.967 v1(-9.779,16.967) ; 6.452,12.548 7.747,12.548 7.953,12.341 7.953,12.078 v1(8.031,12)
  Bottom Layer w0.203: v1(-9.779,16.967) -8.373,16.967 -2.532,22.809 3.855,22.809 5.664,20.999 5.664,14.367 v1(8.031,12)
TXD1: Atmega?.46 J2.2 | length 39.2
  Top Layer w0.203: v1(-16.966,2.255) -16.966,1.088 -16.849,0.971 -16.849,-0.087 -17.247,-0.484 -17.247,-4.706 -17.826,-5.285 -19.05,-5.285 -19.634,-5.869 -19.634,-6.428 -20.112,-6.906 -20.112,-8.765 -18.565,-10.312 -16.866,-10.312 J2.2 ; Atmega?.46 v1(0.266,6.018)
  Bottom Layer w0.203: v1(-16.966,2.255) -16.962,2.251 -16.24,2.251 -16.103,2.388 -11.957,2.388 -7.946,6.399 -6.853,6.399 -6.472,6.018 v1(0.266,6.018)
TXD2: "RS ?.3"@-3.886,-1.372 Atmega?.13 | length 21.8
  Top Layer w0.203: Atmega?.13 -12.313,12.243 -13.178,11.377 -13.178,5.662 -10.816,3.3 -9.216,3.3 -8.327,2.411 -6.041,2.411 -5.202,1.573 -5.202,-1.372 -3.886,-1.372
TXD3: "RS ?.3"@-11.405,-1.422 Atmega?.64 | length 47.7
  Top Layer w0.203: v1(-14.323,-1.422) -11.405,-1.422 ; v1(0.813,13.157) 0.846,13.157 1.261,12.743 Atmega?.64
  Bottom Layer w0.203: v1(-14.323,-1.422) -14.323,-0.887 -14.981,-0.229 -20.205,-0.229 -21.557,0.934 -22.591,1.968 -22.591,2.929 -20.417,5.104 -18.055,5.104 -17.204,5.954 -17.204,9.497 -16.735,9.967 -0.866,9.967 0.813,11.646 v1(0.813,13.157)
VCC-3.3V(OBC): "Micro SDCard Slot?.4" ?.14 J2.5 | length 22.3
  Top Layer w0.203: J2.5 -17.473,-7.165 -16.866,-7.165 -16.409,-7.622 ?.14@-12.192,-7.622 ; v1(-13.621,-10.439) -12.192,-9.01 ?.14@-12.192,-7.622 ; ?.14 ?.14@-12.192,-7.622 ; v1(-7.569,-16.459) -7.459,-16.459 -7.163,-16.163 -6.433,-16.163 -6.225,-15.955
  Bottom Layer w0.203: v1(-13.621,-10.439) -13.621,-11.174 -13.915,-11.467 -13.915,-12.092 -12.543,-13.464 -9.876,-13.464 -7.569,-15.771 v1(-7.569,-16.459)
VCC-5V(CAMERA): J1.6
VCC-5V(COMM): J1.18
VCC-5V(EPS): J1.8
VCC-5V(OBC): "RS ?.1" Atmega?.10 Atmega?.31 Atmega?.61 Atmega?.80 Atmega?.100 C?.1@21.235,-2.896 C?.1@-0.457,-5.029 C?.1@-12.776,-5.055 C?.2@12.572,-19.482 C?.2@23.342,0.102 C?.2@-9.783,-18.207 C?.2@-21.337,0.838 J1.1 R?.1@6.111,8.766 R?.1@10.69,17.338 R?.1@21.485,6.441 R?.1@-10.653,-15.313 | length 61.2
  Top Layer w0.203: v1(-22.225,-1.031) -22.202,-1.008 -21.48,-1.008 -21.337,-0.864 C?.2@-21.337,0.838 ; v1(-13.132,-6.655) -13.132,-6.545 -12.776,-6.189 C?.1@-12.776,-5.055 ; v1(-12.958,13.743) Atmega?.10 ; v1(-11.999,-16.612) -11.922,-16.534 -11.704,-16.534 -10.653,-15.483 R?.1@-10.653,-15.313 ; -11.405,1.118 -10.681,1.118 -10.146,0.583 -9.751,0.583 v1(-9.673,0.505) ; v1(-10.777,20.166) -10.667,20.166 -10.414,19.913 Atmega?.100 ; C?.2@-9.783,-18.207 -9.783,-18.347 -9.335,-18.796 -8.535,-18.796 v1(-7.95,-19.38) ; Atmega?.31 -7.234,6.076 v1(-6.299,7.01) ; -3.886,1.168 -3.886,2.176 -3.632,2.43 v1(-3.632,2.54) ; v1(-1.016,-9.271) -0.457,-8.712 C?.1@-0.457,-5.029 ; Atmega?.80 0.305,19.951 0.305,20.701 1.295,21.692 1.295,22.922 1.86,23.486 3.301,23.486 3.465,23.322 3.465,20.889 v1(3.436,20.86) ; v1(1.981,10.236) 1.981,10.293 2.384,10.696 2.384,10.918 2.708,11.243 3.106,11.243 Atmega?.61 ; v1(2.108,7.618) 2.765,8.275 2.765,10.821 3.106,11.162 4.766,11.162 5.187,10.742 5.187,9.86 6.111,8.936 R?.1@6.111,8.766 ; 6.452,15.088 6.452,15.543 6.248,15.746 6.248,15.914 6.514,16.18 v1(7.29,16.18) ; v1(7.442,-18.593) 9.395,-18.593 9.572,-18.415 11.415,-18.415 11.676,-18.676 11.676,-19.363 11.795,-19.482 C?.2@12.572,-19.482 ; R?.1@10.69,17.338 10.86,17.338 12.42,18.898 12.42,19.43 v1(12.497,19.507) ; v1(20.904,-1.295) 20.904,-1.405 21.235,-1.736 C?.1@21.235,-2.896 ; v1(21.107,10.363) 20.431,9.686 20.431,7.657 20.594,7.494 21.342,7.494 21.485,7.351 R?.1@21.485,6.441 ; C?.2@23.342,0.102 23.342,-0.893 23.672,-1.223 v1(23.754,-1.223)
VCC-9V(OBC): J2.7
XTAL1: Atmega?.34 C?.2@-21.111,-2.791 R?.1@21.3,3.915 Y?.2 | length 86.7
  Top Layer w0.203: v1(-21.234,-4.267) -21.157,-4.189 -21.157,-3.927 -21.111,-3.882 C?.2@-21.111,-2.791 ; Atmega?.34 -5.695,4.611 -5.695,5.361 -4.097,6.96 v1(-2.54,6.96) ; v1(10.693,8.534) v1@10.693,8.424 ; v1(12.933,-3.532) 12.933,-1.012 10.45,1.471 Y?.2 10.45,8.181 v1@10.693,8.424 ; v1(13.467,6.628) 11.841,6.628 11.035,7.433 10.704,7.433 10.693,7.444 v1@10.693,8.424 ; v1(20.698,2.315) 20.78,2.315 21.3,2.835 R?.1@21.3,3.915
  Bottom Layer w0.203: v1(-21.234,-4.267) -21.234,-4.318 -20.318,-5.234 -13.254,-5.234 -10.404,-2.384 -5.946,-2.384 -4.758,-1.196 -2.515,-1.196 -1.082,-2.629 -0.233,-2.629 0.239,-3.101 2.646,-3.101 3.078,-3.532 v1(12.933,-3.532) ; v1(-2.54,6.96) 4.382,6.96 5.017,6.324 8.744,6.324 9.68,7.26 9.68,7.521 v1(10.693,8.534) ; v1(13.467,6.628) 15.092,5.002 19.004,5.002 20.698,3.308 v1(20.698,2.315)
XTAL2: Atmega?.33 C?.2@-6.684,-5.051 R?.2@-21.111,3.737 Y?.1 | length 66
  Top Layer w0.203: R?.2@-21.111,3.737 -21.111,2.696 v1(-20.777,2.362) ; v1(-6.278,-7.596) -6.684,-7.19 -6.684,-5.051 -6.684,-4.218 -2.541,-4.218 -1.676,-3.354 -1.676,-1.977 -1.88,-1.774 -1.88,-0.846 -2.235,-0.49 -2.235,1.015 -1.479,1.771 -1.479,1.939 -3.043,3.503 -6.234,3.503 Atmega?.33 -6.195,4.611 -6.195,5.489 v1(-3.962,7.722) ; v1(10.45,-7.596) Y?.1
  Bottom Layer w0.203: v1(-20.777,2.362) -17.685,2.362 -16.895,3.152 -16.563,3.152 -16.503,3.093 cw(c-16.647,2.949) -16.502,3.091 ccw(c-15.748,3.81) -14.994,3.091 cw(c-14.849,2.949) -14.993,3.093 -14.933,3.152 -11.929,3.152 -7.36,7.722 v1(-3.962,7.722) ; v1(-6.278,-7.596) v1(10.45,-7.596)
pads on no net: "Micro SDCard Slot?.1" "Micro SDCard Slot?.8" "Micro SDCard Slot?.9" "Micro SDCard Slot?.GND" Atmega?.4 Atmega?.8 Atmega?.9 Atmega?.14 Atmega?.15 Atmega?.16 Atmega?.17 Atmega?.18 Atmega?.19 Atmega?.23 Atmega?.24 Atmega?.25 Atmega?.26 Atmega?.27 Atmega?.28 Atmega?.29 Atmega?.35 Atmega?.36 Atmega?.37 Atmega?.38 Atmega?.39 Atmega?.40 Atmega?.41 Atmega?.42 Atmega?.47 Atmega?.48 Atmega?.49 Atmega?.50 Atmega?.51 Atmega?.52 Atmega?.53 Atmega?.54 Atmega?.55 Atmega?.56 Atmega?.57 Atmega?.58 Atmega?.59 Atmega?.60 Atmega?.65 Atmega?.66 Atmega?.67 Atmega?.68 Atmega?.69 Atmega?.70 Atmega?.71 Atmega?.72 Atmega?.73 Atmega?.74 Atmega?.75 Atmega?.76 Atmega?.77 Atmega?.78 Atmega?.79 Atmega?.82 Atmega?.83 Atmega?.84 Atmega?.85 Atmega?.86 Atmega?.87 Atmega?.88 Atmega?.89 Atmega?.90 Atmega?.91 Atmega?.92 Atmega?.93 Atmega?.94 J1.3 J1.5 J1.7 J1.9 J1.11 J1.13 J1.15 J1.17 J1.19 J2.6 J2.9 J2.13

## Polygon pours and split planes (outlines as drawn)
G on Ground (split plane): 233 vertices, not listed, extent -24.492,-24.491 24.491,24.492
VCC-5V(OBC) on Power (split plane): 233 vertices, not listed, extent -24.492,-24.491 24.491,24.492

## Silkscreen, mask and mechanical layers (free items; w line width, h text height)
Mechanical 1:
  circle w0.254: c-0.001,0 r25